# Altium PCB Thoi_gian_thuc.PcbDoc
Units mil, origin at the board's own origin, x right, y up, seen from the top; angles counter-clockwise.
Board outline 4486.03 x 3654.03 mil, 2 copper layers (Top Layer, Bottom Layer); 91 components, 78 nets, 312 pads, 86 vias.
Unrouted connection lines stored in the file: 3.
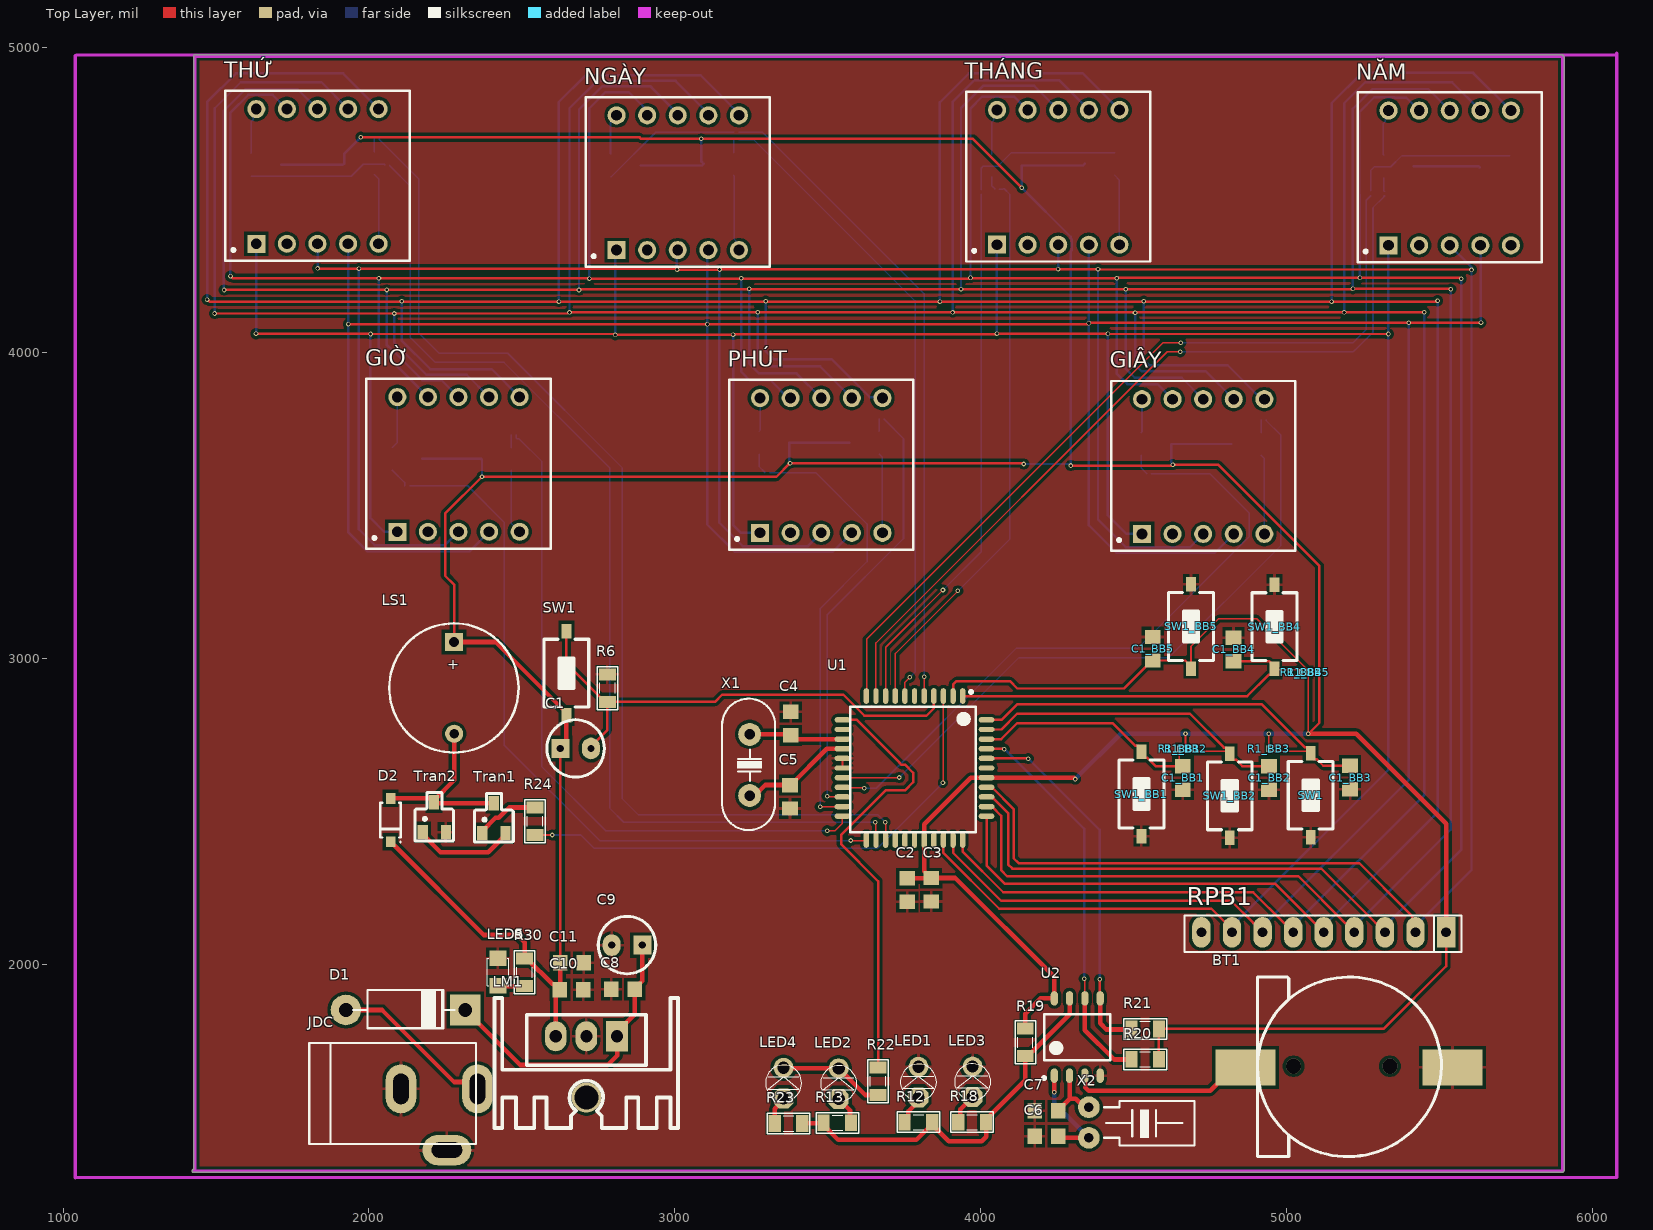
[diagram p0: Top Layer view]
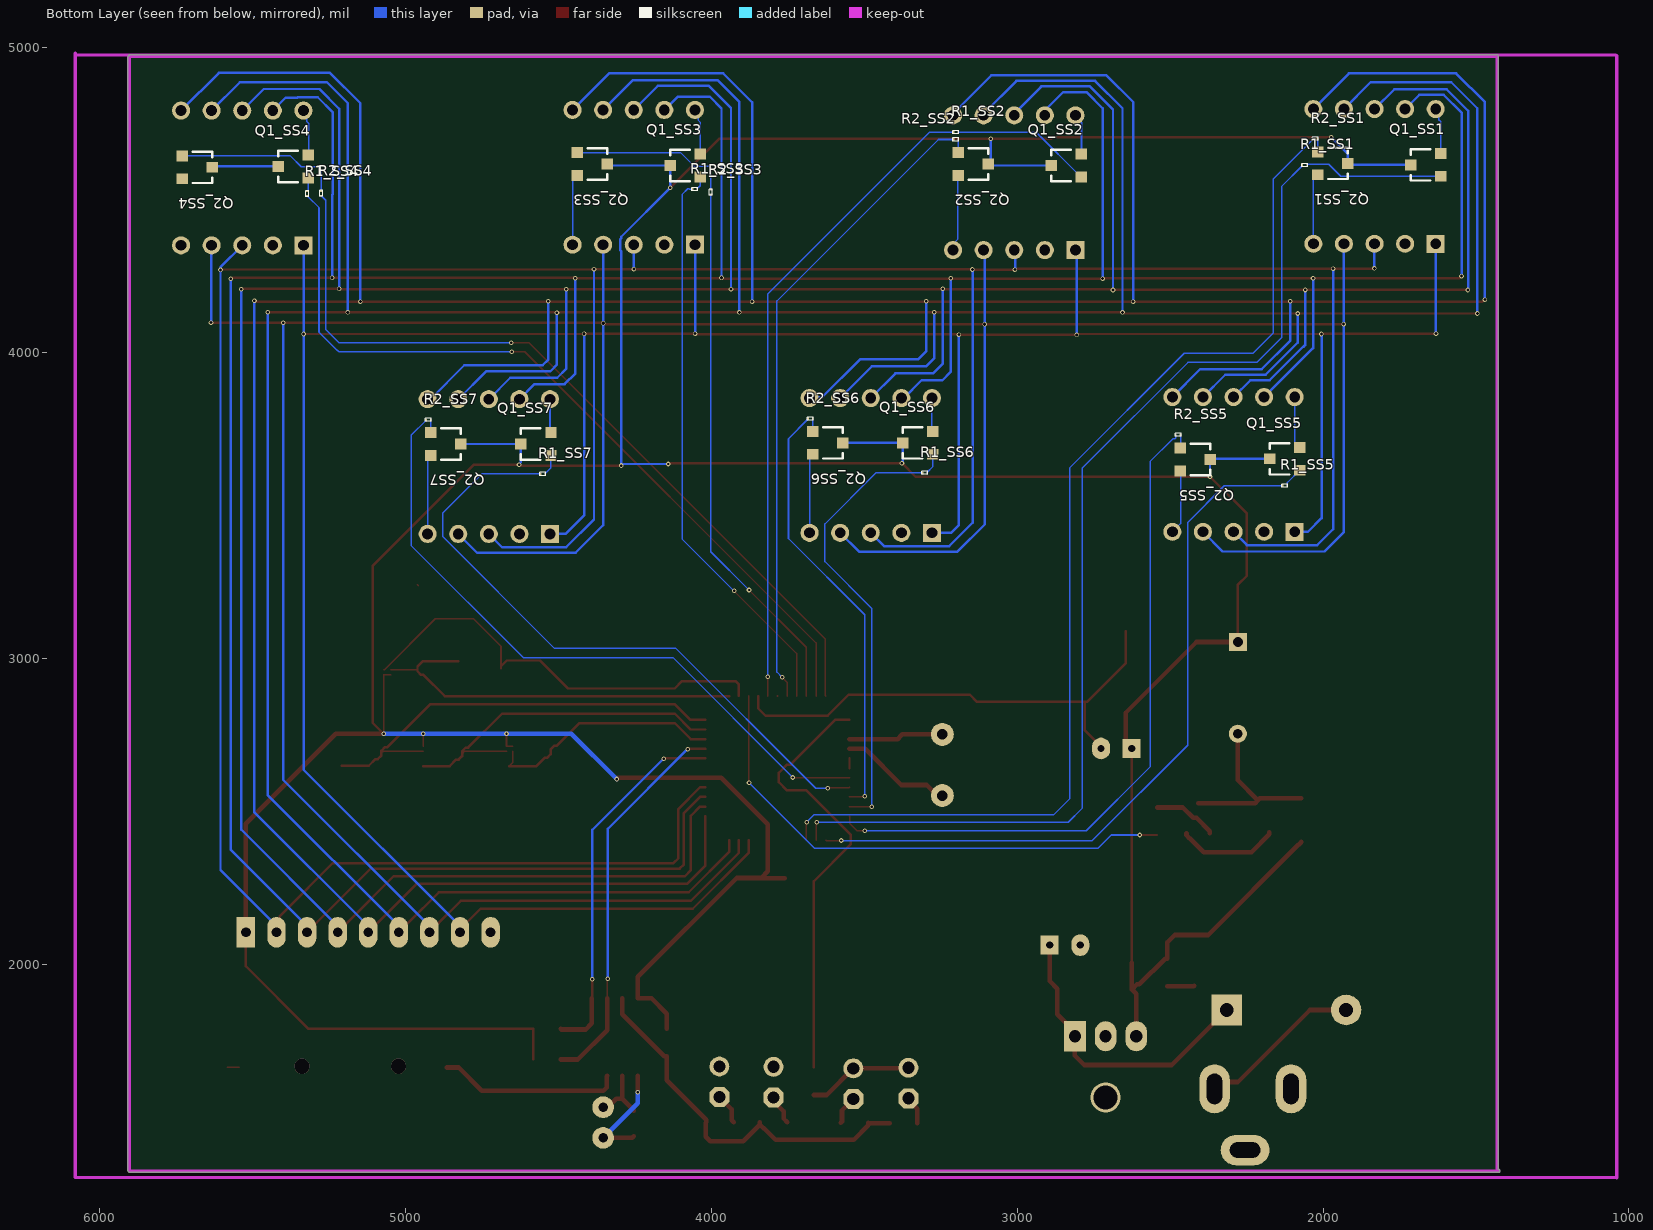
[diagram p1: Bottom Layer view, seen from below]

## Layer stack, top to bottom
Top Solder: solder mask 0.4, Solder Resist, Dk 3.5
Top Layer: signal copper 1.4
Dielectric 1: dielectric 12.6, FR-4, Dk 4.8
Bottom Layer: signal copper 1.4
Bottom Solder: solder mask 0.4, Solder Resist, Dk 3.5

## Board outline
1427,1320.98 cw(c1427,1326) 1426.98,1331.02 1426.98,4970 cw(c1432,4970) 1432,4975.02 5900,4975.02 cw(c5900,4970) 5904.71,4971.71 cw(c5903,4967) 5908.02,4967 5908.02,1328 cw(c5903,1328) 5905.4,1323.6 cw(c5901,1326) 5901,1320.98

## Design rules (kind name [scope] priority, off if disabled: settings)
Clearance [All] p1: gap=10 ignorepadtopadclearanceinfootprint=FALSE except(0: Arc-Hole Track-Hole SMDPad-Hole THPad-Hole Via-Hole Fill-Hole Poly-Hole Region-Hole Text-Hole)
PolygonConnect [All] p1: connectstyle=Relief reliefconductorwidth=10 reliefentries=4 polygonreliefangle="90 Angle" airgapwidth=10
RoomDefinition BB5 [InComponentClass('BB5')] p1: confinementstyle=ConfineIn formatcopy=TRUE lockcomponents=FALSE outline 0,0 2000,0 2000,1000 0,1000
RoomDefinition SS4 [InComponentClass('SS4')] p2: confinementstyle=ConfineIn formatcopy=TRUE lockcomponents=FALSE outline 0,0 2000,0 2000,1000 0,1000
RoomDefinition SS3 [InComponentClass('SS3')] p3: confinementstyle=ConfineIn formatcopy=TRUE lockcomponents=FALSE outline 0,0 2000,0 2000,1000 0,1000
RoomDefinition SS2 [InComponentClass('SS2')] p4: confinementstyle=ConfineIn formatcopy=TRUE lockcomponents=FALSE outline 0,0 2000,0 2000,1000 0,1000
RoomDefinition SS1 [InComponentClass('SS1')] p5: confinementstyle=ConfineIn formatcopy=TRUE lockcomponents=FALSE outline 0,0 2000,0 2000,1000 0,1000
RoomDefinition Thoi_gian_thuc [InComponentClass('Thoi_gian_thuc')] p6: confinementstyle=ConfineIn formatcopy=TRUE lockcomponents=FALSE outline 7012,1039 18258,1039 18258,2062 7012,2062
RoutingVias [All] p1: holewidth=8 width=15 viastyle="Through Hole" minholewidth=8 minwidth=15 maxholewidth=8 maxwidth=15
SolderMaskExpansion [All] p1: expansion=4 istentingtop=FALSE
Width [All] p1: maxlimit=15 minlimit=5 preferedwidth=8
30 further rules are at their usual default settings.

## Classes and differential pairs
channel class Led_7seg: SS1 SS2 SS3 SS4 SS5 SS6 SS7
channel class Button: BB1 BB2 BB3 BB4 BB5
component class Thoi_gian_thuc: BT1 C1 C2 C3 C4 C5 C6 C7 C8 C9 C10 C11 D1 D2 JDC LED1 LED2 LED3 LED4 LED5 LM1 LS1 R6 R12 R18 R19 R20 R21 R22 R23 R24 R30 RPB1 SW1 Tran1 Tran2 U1 U2 X1 X2
component class SS7: GIÂY Q1_SS7 Q2_SS7 R1_SS7 R2_SS7
component class SS6: PHÚT Q1_SS6 Q2_SS6 R1_SS6 R2_SS6
component class SS5: GIỜ Q1_SS5 Q2_SS5 R1_SS5 R2_SS5
component class SS4: Q1_SS4 Q2_SS4 R1_SS4 R2_SS4
component class SS3: Q1_SS3 Q2_SS3 R1_SS3 R2_SS3 THÁNG
component class SS2: Q1_SS2 Q2_SS2 R1_SS2 R2_SS2
component class SS1: Q1_SS1 Q2_SS1 R1_SS1
component class BB5: C1_BB5 R1_BB5 SW1_BB5
component class BB4: C1_BB4 R1_BB4 SW1_BB4
component class BB3: C1_BB3 R1_BB3
component class BB2: C1_BB2 R1_BB2 SW1_BB2
component class BB1: C1_BB1 R1_BB1 SW1_BB1

## Components (designator, comment, footprint, x,y, rotation, side; value= is the part's Value field where it differs from the comment)
BT1 "PIN 3V" "PIN CR1220-SMD" 4905.21,1959.28 r270 top
C1 "10uF" CA-ALU-2.54 2676,2707 r0 top value=104
C1_BB1 "0.47uF/1.6kV" "cap 0805" 4661,2611 r90 top (schematic designator C1)
C1_BB2 "0.47uF/1.6kV" "cap 0805" 4943,2611 r90 top (schematic designator C1)
C1_BB3 "0.47uF/1.6kV" "cap 0805" 5208,2612 r90 top (schematic designator C1)
C1_BB4 "0.47uF/1.6kV" "cap 0805" 4827,3031 r270 top (schematic designator C1)
C1_BB5 "0.47uF/1.6kV" "cap 0805" 4563,3033 r270 top (schematic designator C1)
C2 "0.47uF/1.6kV" "cap 0805" 3760,2244 r90 top
C3 "0.47uF/1.6kV" "cap 0805" 3839,2245 r90 top
C4 "0.47uF/1.6kV" "cap 0805" 3379,2788 r270 top
C5 "0.47uF/1.6kV" "cap 0805" 3377,2549 r90 top
C6 "0.47uF/1.6kV" "cap 0805" 4215,1439 r0 top
C7 "0.47uF/1.6kV" "cap 0805" 4215,1522 r0 top
C8 "0.47uF/1.6kV" "cap 0805" 2831,1920 r0 top
C9 "10uF" CA-ALU-2.54 2844,2064 r180 top value=104
C10 "0.47uF/1.6kV" "cap 0805" 2663,1918 r180 top
C11 "0.47uF/1.6kV" "cap 0805" 2664,2006 r180 top
D1 "Diode" DIO-2A 2340,1852 r180 top value=1N5007
D2 "1N4148" SOD123 2071,2473 r270 top
GIÂY "LED7SEG-2" LED7SEG-2-0.36#1 4727.79,3638.28 r0 top (schematic designator DS1)
GIỜ "LED7SEG-2" LED7SEG-2-0.36#1 2293,3645.37 r0 top (schematic designator DS1)
JDC "Jac DC" DC0 2230,1494 r0 top
LED1 "LED" LED-3MM-RED 3797,1566 r90 top value="LED 3 ly Single Colour"
LED2 "LED" LED-3MM-RED 3536,1561 r90 top value="LED 3 ly Single Colour"
LED3 "LED" LED-3MM-RED 3974,1567 r90 top value="LED 3 ly Single Colour"
LED4 "LED" LED-3MM-RED 3356,1563 r90 top value="LED 3 ly Single Colour"
LED5 "LED smd" LED-0805-Red 2422,1931 r90 top
LM1 "LM78xx" TO220-H3 2709,1670 r180 top
LS1 "Speaker" SPEAKER 2278.5,3055 r270 top
NGÀY "LED7SEG-2" LED7SEG-2-0.36#1 3010,4566.37 r0 top (schematic designator DS1)
NĂM "LED7SEG-2" LED7SEG-2-0.36#2 5534,4582 r0 top (schematic designator DS1)
PHÚT "LED7SEG-2" LED7SEG-2-0.36#1 3479,3642 r0 top (schematic designator DS1)
Q1_SS1 "2SC1815" SOT23-321 1665,4615 r90 bottom value=C1815 (schematic designator Q1)
Q1_SS2 "2SC1815" SOT23-321 2840,4613 r90 bottom value=C1815 (schematic designator Q1)
Q1_SS3 "2SC1815" SOT23-321 4086,4613 r90 bottom value=C1815 (schematic designator Q1)
Q1_SS4 "2SC1815" SOT23-321 5367,4610 r90 bottom value=C1815 (schematic designator Q1)
Q1_SS5 "2SC1815" SOT23-321 2125,3654 r90 bottom value=C1815 (schematic designator Q1)
Q1_SS6 "2SC1815" SOT23-321 3324.99,3706.12 r90 bottom value=C1815 (schematic designator Q1)
Q1_SS7 "2SC1815" SOT23-321 4573.79,3702.4 r90 bottom value=C1815 (schematic designator Q1)
Q2_SS1 "2SC1815" SOT23-321 1969,4620 r270 bottom value=C1815 (schematic designator Q2)
Q2_SS2 "2SC1815" SOT23-321 3144,4618 r270 bottom value=C1815 (schematic designator Q2)
Q2_SS3 "2SC1815" SOT23-321 4390,4618 r270 bottom value=C1815 (schematic designator Q2)
Q2_SS4 "2SC1815" SOT23-321 5681,4607 r270 bottom value=C1815 (schematic designator Q2)
Q2_SS5 "2SC1815" SOT23-321 2418,3652 r270 bottom value=C1815 (schematic designator Q2)
Q2_SS6 "2SC1815" SOT23-321 3619.99,3706.12 r270 bottom value=C1815 (schematic designator Q2)
Q2_SS7 "2SC1815" SOT23-321 4868.79,3702.4 r270 bottom value=C1815 (schematic designator Q2)
R1_BB1 "Res" RES-SMD-0101 4650,2706 r270 top (schematic designator R1)
R1_BB2 "Res" RES-SMD-0101 4670,2706 r270 top (schematic designator R1)
R1_BB3 "Res" RES-SMD-0101 4942,2706 r270 top (schematic designator R1)
R1_BB4 "Res" RES-SMD-0101 5048.01,2956.13 r90 top (schematic designator R1)
R1_BB5 "Res" RES-SMD-0101 5072.01,2956 r90 top (schematic designator R1)
R1_SS1 "Res" RES-SMD-0101 2060.12,4613.99 r180 bottom (schematic designator R1)
R1_SS2 "Res" RES-SMD-0101 3200.87,4721.99 r180 bottom (schematic designator R1)
R1_SS3 "Res" RES-SMD-0101 4054,4536 r180 bottom (schematic designator R1)
R1_SS4 "Res" RES-SMD-0101 5320.99,4521.13 r90 bottom (schematic designator R1)
R1_SS5 "Res" RES-SMD-0101 2125.12,3565.99 r180 bottom (schematic designator R1)
R1_SS6 "Res" RES-SMD-0101 3302.12,3608.12 r180 bottom (schematic designator R1)
R1_SS7 "Res" RES-SMD-0101 4550.91,3604.4 r180 bottom (schematic designator R1)
R2_SS1 "Res" RES-SMD-0101 2026,4700 r180 bottom (schematic designator R2)
R2_SS2 "Res" RES-SMD-0101 3201,4698 r180 bottom (schematic designator R2)
R2_SS3 "Res" RES-SMD-0101 4001.99,4526.13 r90 bottom (schematic designator R2)
R2_SS4 "Res" RES-SMD-0101 5275.99,4522.13 r90 bottom (schematic designator R2)
R2_SS5 "Res" RES-SMD-0101 2473.87,3732.49 r180 bottom (schematic designator R2)
R2_SS6 "Res" RES-SMD-0101 3676.87,3785.12 r180 bottom (schematic designator R2)
R2_SS7 "Res" RES-SMD-0101 4925.66,3781.4 r180 bottom (schematic designator R2)
R6 "Res" RES-SMD-0805 2780,2904 r270 top
R12 "Res" RES-SMD-0805 3797,1485 r180 top
R13 "Res" RES-SMD-0805 3532,1483 r0 top
R18 "Res" RES-SMD-0805 3972,1485 r180 top
R19 "Res" RES-SMD-0805 4146,1746 r90 top
R20 "Res" RES-SMD-0805 4538,1691 r0 top
R21 "Res" RES-SMD-0805 4538,1790 r0 top
R22 "Res" RES-SMD-0805 3665,1619 r270 top
R23 "Res" RES-SMD-0805 3372,1481 r180 top
R24 "Res" RES-SMD-0805 2543,2469 r270 top
R30 "Res" RES-SMD-0805 2509,1975 r90 top
RPB1 "10K" RN8 5522,2106 r180 top value="Tro thanh 10K"
SW1 "SW" SW-SMD_apes 2646,2953 r270 top value="SW chip 2 pin"
SW1 "SW" SW-SMD_apes 5079,2554 r90 top value="SW chip 2 pin"
SW1_BB1 "SW" SW-SMD_apes 4526,2558 r90 top value="SW chip 2 pin" (schematic designator SW1)
SW1_BB2 "SW" SW-SMD_apes 4815,2552.2 r90 top value="SW chip 2 pin" (schematic designator SW1)
SW1_BB4 "SW" SW-SMD_apes 4961,3105 r270 top value="SW chip 2 pin" (schematic designator SW1)
SW1_BB5 "SW" SW-SMD_apes 4688,3105.8 r270 top value="SW chip 2 pin" (schematic designator SW1)
THÁNG "LED7SEG-2" LED7SEG-2-0.36#1 4254,4584 r0 top (schematic designator DS1)
THỨ "LED7SEG-2" LED7SEG-2-0.36#1 1832,4587 r0 top (schematic designator DS1)
Tran1 "C1815" C1815 2411,2479 r0 top
Tran2 "C1815" C1815 2216,2482 r0 top
U1 "AT89S52-24AU" TQFP44 3784,2643 r270 top
U2 "DS1307" "DS1307 SMD" 4316,1765 r90 top
X1 "12Mhz" XT2 3245,2653 r90 top value=4Mhz
X2 "12Mhz" XT32k 4354,1534 r0 top value=4Mhz

## Footprints (in the part's own frame and the unit in brackets; to place one, negate y for a bottom-side part, rotate by r counter-clockwise, add the part's x,y. Pads: shape width x height; smd on the part's side, far side on the other; paste and mask are expansions set on the pad)
C1815 [mm] "C1815"
  rect 0.85x1.2 smd: 1(-1.016,-1.245) 2(0.909,-1.25) 3(-0.071,1.25)
  silkscreen extent -1.65,-1.98 1.55,2.06, body extent -1.55,-1.33 1.45,1.17, height 1.06
CA-ALU-2.54 [mm]
  rect 1.5x1.58 hole 0.6: 1(-1.27,0)
  oval 1.5x1.8 hole 0.6: 2(1.27,0)
  silkscreen extent -2.39,-2.39 2.39,2.39, body extent -2,-2.03 1.99,1.97, height 7.01
"cap 0805" [mm] "Molded Capacitor, 2-Leads, Body 2,0x1,3mm, IPC Medium Density"
  rect 1.2x1.3 smd: 1(-0.975,0) 2(0.975,0)
  body extent -1,-0.62 1,0.63, height 1.8
DC0 [mil] "Jac DC input"
  oval 100x160 hole 50 slot 100 at 90 deg: 1(125,100) 2(-125,100)
  oval 160x100 hole 50 slot 100 at 0 deg: 3(25,-100)
  silkscreen extent -425,-80 120,250, body extent -410,-105 134,269, height 434
DIO-2A [mil] "Diode 2A, W 150mil, L 450mil"
  round 100 hole 45: 1(415,0)
  rect 100x100 hole 45: 2(25,0)
  silkscreen extent 61,-65 391,60, body extent 4,-65 436,61, height 113
"DS1307 SMD" [mm] "DS1307 SMD"
  oval 1.2x0.6 smd: 1(-3.247,1.905) 2(-3.247,0.635) 3(-3.247,-0.635) 4(-3.247,-1.905) 5(3.172,-1.905) 6(3.172,-0.635) 7(3.172,0.635) 8(3.172,1.905)
  silkscreen extent -3.58,-2.75 1.85,2.88, body extent -3.15,-2.39 3.05,2.44, height 1.7
LED7SEG-2-0.36#1 [mm] "LED, 7-Segment Display, 9.2 mm, Dual Digit; 10 Leads; Row Space 10.7 mm; Pitch 2.54 mm"
  rect 1.5x1.5 hole 0.9: 1(-5.08,-5.842)
  round 1.5 hole 0.9: 2(-2.54,-5.842) 3(0,-5.842) 4(2.54,-5.842) 5(5.08,-5.842) 6(5.08,5.35) 7(2.54,5.35) 8(0,5.35) 9(-2.54,5.35) 10(-5.08,5.35)
  silkscreen extent -7.65,-7.24 7.65,6.86, body extent -7.5,-7.26 7.5,6.75, height 12.02
LED7SEG-2-0.36#2 [mm] "LED, 7-Segment Display, 9.2 mm, Dual Digit; 10 Leads; Row Space 10.7 mm; Pitch 2.54 mm"
  round 1.5 hole 0.9: 2(-2.54,-5.842) 3(0,-5.842) 4(2.54,-5.842) 5(5.08,-5.842) 6(5.08,5.35) 7(2.54,5.35) 8(0,5.35) 9(-2.54,5.35) 10(-5.08,5.35)
  rect 1.5x1.5 hole 0.9: S(-5.08,-5.842)
  silkscreen extent -7.65,-7.24 7.65,6.86, body extent -7.5,-7.26 7.5,6.75, height 12.02
LED-3MM-RED [mil]
  oct 65x65 hole 40: 1(0,0)
  round 65 hole 40: 2(100,0)
  silkscreen extent -9,-59 109,59, body extent -27,-77 117,80, height 181
LED-0805-Red [mil]
  rect 50x55 smd: 1(0,0) 2(90,0)
  silkscreen extent 0,-35 90,35, body extent 5,-25 85,25, height 43
"PIN CR1220-SMD" [mm]
  rect 3x5 smd: 1(7.5,-1) 2(7.5,16.2)
  silkscreen extent 0,0 14.9,15.3, body extent -0.18,-3.75 14.92,15.3, height 3
RES-SMD-0101 [mm]
  rect 0.15x0.25 smd: 1(-0.2,0) 2(0.2,0)
  silkscreen extent -0.25,-0.13 0.25,0.13, body extent -0.2,-0.1 0.2,0.1, height 0.12
RES-SMD-0805 [mil]
  rect 39.37x55 smd: 1(-45,0) 2(45,0)
  silkscreen extent -70,-34 70,33, body extent -39,-25 39,25, height 31
RN8 [mil] "R SIP8, 9 Pin"
  rect 60x100 hole 32: 1(0,0)
  oval 60x100 hole 32: 2(100,0) 3(200,0) 4(300,0) 5(400,0) 6(500,0) 7(600,0) 8(700,0) 9(800,0)
  silkscreen extent -50,-55 855,65, body extent -43,-44 843,5, height 259
SOD123 [mm] "SODFL, 2-Leads, Body 1.55x3.70mm, IPC Low Density"
  rect 0.9x0.8 smd: A(-1.8,0) K(1.8,0)
  silkscreen extent -1.45,-0.85 1.87,0.88, body extent -1.88,-0.77 1.82,0.83, height 1.27
SOT23-321 [mm]
  rect 0.9x0.95 smd mask+0: 1(0.95,-1.25)
  rect 0.9x0.95 smd: 2(0,1.25) 3(-0.95,-1.25)
  silkscreen extent -1.3,-0.38 1.3,1.25, body extent -1.52,-1.23 1.48,1.27, height 1.06
SPEAKER [mm]
  rect 1.5x1.5 hole 0.8: 1(0,0)
  round 1.5 hole 0.8: 2(7.62,0.013)
  silkscreen extent -1.55,-5.38 9.18,5.36, body extent -2.22,-6 13.24,6, height 4.5
SW-SMD_apes [mm] "Switch SMD type"
  rect 1.2x0.8 smd: 1(-3.5,0) 2(3.5,0)
  silkscreen extent -2.82,-1.85 2.82,1.85, body extent -3.05,-1.85 3.05,1.85, height 2.5
TO220-H3 [mm] "TO220-H3"
  round 2.5 hole 2: 0(-0.051,2.642)
  rect 1.8x2.5 hole 1: 1(-2.591,-2.438)
  oval 1.8x2.5 hole 1: 2(-0.051,-2.438) 3(2.489,-2.438)
  silkscreen extent -7.67,-5.61 7.57,5.18, body extent -7.42,-5.04 7.37,5.77, height 25
TQFP44 [mm] "TQFP, 44-Leads, Body 10X10mm, Pitch 0.80mm, IPC High Density"
  oval 1.3x0.45 smd: 1(-5.981,4) 2(-5.981,3.2) 3(-5.981,2.4) 4(-5.981,1.6) 5(-5.981,0.8) 6(-5.981,0) 7(-5.981,-0.8) 8(-5.981,-1.6) 9(-5.981,-2.4) 10(-5.981,-3.2) 11(-5.981,-4) 23(5.981,-4) 24(5.981,-3.2) 25(5.981,-2.4) 26(5.981,-1.6) 27(5.981,-0.8) 28(5.981,0) 29(5.981,0.8) 30(5.981,1.6) 31(5.981,2.4) 32(5.981,3.2) 33(5.981,4)
  oval 0.45x1.3 smd: 12(-4,-5.981) 13(-3.2,-5.981) 14(-2.4,-5.981) 15(-1.6,-5.981) 16(-0.8,-5.981) 17(0,-5.981) 18(0.8,-5.981) 19(1.6,-5.981) 20(2.4,-5.981) 21(3.2,-5.981) 22(4,-5.981) 34(4,5.981) 35(3.2,5.981) 36(2.4,5.981) 37(1.6,5.981) 38(0.8,5.981) 39(0,5.981) 40(-0.8,5.981) 41(-1.6,5.981) 42(-2.4,5.981) 43(-3.2,5.981) 44(-4,5.981)
  silkscreen extent -6.45,-5.33 5.33,5.07, body extent -5.99,-5.96 6.01,6.04, height 1.05
XT2 [mil] "Footpin for Crystal 2 pin"
  round 75 hole 34: 1(-100,0) 2(100,0)
  silkscreen extent -213,-83 217,90, body extent -216,-87 216,90, height 144
XT32k [mm]
  round 1.8 hole 0.813: 1(0,0) 2(0,-2.54)
  silkscreen extent 1.27,-3.17 8.76,0.51, body extent -0.15,-2.42 8.2,-0.12, height 1.95

## Part data
BT1: "Battery 3VDC"
C1 C9: library part CN-ALU-DIP, "Capacitor (Semiconductor SIM Model)", LatestRevisionDate=17-Jul-2002, LatestRevisionNote="Re-released for DXP Platform.", PackageReference=C1206, Publisher="Altium Limited"
C1_BB1 C1_BB2 C1_BB3 C1_BB4 C1_BB5 C2 C3 C4 C5 C6 C7 C8 C10 C11: library part Cap
D1: "Default Diode", Code - JEDEC=DO-214-AB, Published=8-Jun-2000, Publisher="Altium Limited", Revision="July-2002: Re-released for DXP Platform."
D2: library part "Diode 1N4148"
GIÂY GIỜ NGÀY NĂM PHÚT THÁNG THỨ: "9.2 mm Green 7-Segment Display: 2-Digit, RH DP", ComponentLink1Description="Manufacturer Link", ComponentLink1URL=http://www.avagotech.com/, DatasheetVersion=14-Mar-2003, LatestRevisionDate=11-Oct-2004, LatestRevisionNote="Display outline superimposed on PCB Footprint.", PackageDescription="LED, 7-Segment Display, 9.2 mm, Dual Digit; 10 Leads; Row Space 10.7 mm; Pitch 2.54 mm", PackageReference=HDSM-577, PackageVersion=14-Mar-2003, Published=26-May-2004, Publisher="Altium Limited"
JDC: library part DCIN, "Jac DC input"
LED1 LED2 LED3 LED4: "LED Single colour Green and Red"
LS1: "Loudspeaker", LatestRevisionDate=17-Jul-2002, LatestRevisionNote="Re-released for DXP Platform.", PackageReference=PIN2, Published=24-Mar-1999, Publisher="Altium Limited"
Q1_SS1 Q1_SS2 Q1_SS3 Q1_SS4 Q1_SS5 Q1_SS6 Q1_SS7 Q2_SS1 Q2_SS2 Q2_SS3 Q2_SS4 Q2_SS5 Q2_SS6 Q2_SS7: "NPN 600mW, ECB"
R1_BB1 R1_BB2 R1_BB3 R1_BB4 R1_BB5 R1_SS1 R1_SS2 R1_SS3 R1_SS4 R1_SS5 R1_SS6 R1_SS7 R2_SS1 R2_SS2 R2_SS3 R2_SS4 R2_SS5 R2_SS6 R2_SS7 R6 R12 R13 R18 R19 R20 R21 R22 R23 R24 R30: library part Res-SMD, "Resistor", Manufacturer="Generic Components", Class=Passive, Published=08/06/2000, Publisher="Altium Hobart Technology Centre"
RPB1: library part RN8, "Resistor 8 (Thanh)"
SW1 SW1 SW1_BB1 SW1_BB2 SW1_BB4 SW1_BB5: library part SW2, "Switch button 2 pin"
U1: "Atmel 8 Bit Micro 4.0-5.5V 24MHz -40 to +80 Deg C 44TQFP (44A) Package GREEN OPTION", Package="44A 44-lead, Thin Plastic Gull Wing Quad Flatpack (TQFP)", GREEN OPTION=YES, PartNr=AT89S52-24AU, Vendor=ATMEL
U2: library part ds1307
X1 X2: library part XT2_1, "Crystal, 32.768 KHz, -40 to 85 degC, 3.2 x 1.5 x 0.9 mm SMD"

## Via types
v1: diameter 15, hole 8, Top Layer to Bottom Layer, 50 vias
v2: diameter 15, hole 10, Top Layer to Bottom Layer, 34 vias
v3: diameter 50, hole 50, Top Layer to Bottom Layer, 2 vias

## Nets (pads, with @x,y where several pads share a name; then routed paths per layer and width w, separated by ;. In a path a pad name is that pad's centre, name@x,y a point inside that pad or via, vN(x,y) a via of type N, cw(c..) or ccw(c..) an arc to the next point about the centre after c; other vN are vias at no path point)
A1: GIÂY.3 GIỜ.3 NGÀY.3 NĂM.3 PHÚT.3 RPB1.2 THÁNG.3 THỨ.3 U1.37 | length 11807
  Top Layer w8: v2(1832.5,4276.5) 1832.96,4276.04 1966.94,4276.04 v2(1967.39,4275.59) v2@3003.02,4275.59 ; v2(3008,4272.5) 3008.25,4272.75 3146.75,4272.75 v2(3147,4273) 3147.62,4273.62 4253.13,4273.62 v2(4253.76,4274.25) 4253.88,4274.12 4383.88,4274.12 4385,4273 5604,4273 v2(5605,4272) ; U1.37 4037.04,2580.01 4108,2509.04 4108,2348 4124,2332 5238,2332 5394,2176 5410.97,2159.03 5410.97,2156.69 5412.05,2155.6 5412.05,2115.95 RPB1.2
  Bottom Layer w5: NGÀY.3@3011,4336.37 NGÀY.3@3011,4345.37 ; THÁNG.3@4231.51,4351.38 THÁNG.3@4231.76,4351.13 ; v2(4253.76,4274.25) THÁNG.3@4253.76,4354.13
  Bottom Layer w8: THỨ.3 1832.25,4356.75 1832.25,4276.75 v2(1832.5,4276.5) ; v2(1967.39,4275.59) 1967.39,3423.61 2019.16,3371.84 2249.47,3371.84 GIỜ.3 ; NGÀY.3@3007,4345 3007,4273.5 v2(3008,4272.5) ; v2(3147,4273) 3146,4272 3146,3445 3222.53,3368.47 3435.47,3368.47 PHÚT.3 ; v2(4253.76,4274.25) 4253.88,4274.37 4253.88,4353.88 THÁNG.3 ; v2(4384,4274) 4384,3456 4475.25,3364.75 4684.27,3364.75 GIÂY.3 ; RPB1.2 5422,2126 5605,2309 v2(5605,4272) 5603.66,4273.34 5603.66,4282.21 NĂM.3@5534.01,4351.86
Alarm: C1_BB5.2 R1_BB5.2 SW1_BB5.2 U1.2 | length 1439.3
  Top Layer w5: SW1_BB5.2 4688,2975.87 4688,3041 4778,3131 4902.91,3131 5070.04,2963.88 R1_BB5.2
  Top Layer w8: U1.2 3909.98,2915.98 3921,2927 4096,2927 4120,2903 4469.42,2903 4561.03,2994.61 C1_BB5.2 4669.26,2994.61 SW1_BB5.2@4688,2975.87
B1: GIÂY.9 GIỜ.9 NGÀY.9 NĂM.9 PHÚT.9 RPB1.3 THÁNG.9 THỨ.9 U1.36 | length 12449.8
  Top Layer w8: v2(1547.5,4251) 1548.69,4251 1555.69,4244 v1(2033,4244) 2720,4244 v2(2721,4243) v2@3962.11,4243 ; v2(3967,4246) 3968,4245 v1(4445,4245) 4445.5,4245.5 5239.5,4245.5 v2(5240,4246) 5566.24,4246 5569.24,4243 v1(5571.13,4243) ; U1.36 4037.04,2548.51 4090,2495.55 4090,2328 4104,2314 5114,2314 5292.05,2135.95 5297.98,2135.95 5322,2111.93 RPB1.3
  Bottom Layer w8: v2(1547.5,4251) 1547.5,4785.79 1605.71,4844 1685.63,4844 THỨ.9 ; v1(2033,4244) 2033,4016 GIỜ.9 ; v2(2721,4243) 2721,4800 2774,4853 2849.63,4853 2907,4795.63 NGÀY.9@2907,4785.63 ; v1(3218,4244) 3218,3938 3245,3911 3312.54,3911 3370.91,3852.63 PHÚT.9 ; v2(3967,4246) 3967,4799.87 4005.29,4838.16 4073.16,4838.16 4073.79,4837.53 4110.98,4837.53 4153.88,4794.63 THÁNG.9 ; v1(4445,4245) 4445,3933 4480,3898 4578.7,3898 GIÂY.9 ; v2(5240,4246) 5240,4516.88 5238.5,4518.38 5238.5,4787.37 5287.16,4836.03 5353.23,4836.03 5354.73,4834.53 5391.98,4834.53 NĂM.9@5434.01,4792.51 ; RPB1.3 5322,2126 5571.13,2375.13 v1(5571.13,4243)
C1: GIÂY.8 GIỜ.8 NGÀY.8 NĂM.8 PHÚT.8 RPB1.4 THÁNG.8 THỨ.8 U1.35 | length 13262.8
  Top Layer w8: v2(1527,4206) v1(2059,4206) v2(2687,4206) 2688.89,4206 2691.89,4209 v2(3936,4209) v1(4475,4209) v2@5212.11,4209 ; U1.35 4037.04,2517.02 4067,2487.05 4067,2309 4087,2289 5039,2289 5192.05,2135.95 5197.98,2135.95 5222,2111.93 RPB1.4 ; v2(5217,4210) 5217.5,4209.5 5536.5,4209.5 v1(5537,4209)
  Bottom Layer w5: 2922.5,4871.5 NGÀY.8@2998.37,4795.63 ; NGÀY.8@3001.37,4787 NGÀY.8@3010,4787 ; 4174.51,4874 4175.51,4873
  Bottom Layer w8: v2(1527,4206) 1526,4207 1526,4792 1596,4862 1767.63,4862 THỨ.8 ; v1(2059,4206) 2059,4025.69 2063.69,4021 2065,4021 2175,3911 2238,3911 GIỜ.8 ; v2(2687,4206) 2687,4796 2762.5,4871.5 2922.5,4871.5 ; 2922.5,4870 2922.63,4870 NGÀY.8@2997.69,4794.94 ; NGÀY.8@3000.69,4786.31 NGÀY.8 ; v1(3244,4210) 3244,3964 3275,3933 3398.63,3933 PHÚT.8 ; v2(3936,4209) 3936,4801 4009,4874 4174.51,4874 ; 4174.51,4873 4175.51,4873 4253.88,4794.63 THÁNG.8 ; v1(4475,4209) 4475,3948 4504,3919 4657.7,3919 GIÂY.8 ; v2(5217,4210) 5217,4798 5282,4863 5463.51,4863 NĂM.8@5534.01,4792.51 ; RPB1.4 5222,2126 5537,2441 v1(5537,4209)
D1: GIÂY.6 GIỜ.6 NGÀY.6 NĂM.6 PHÚT.6 RPB1.5 THÁNG.6 THỨ.6 U1.34 | length 14717.1
  Top Layer w8: v2(1471,4174.62) 1472.89,4174.62 1479.51,4168 v2(2621,4168) 2621.06,4167.94 3866.94,4167.94 v2(3867.01,4167.88) 3867.07,4167.94 5147.94,4167.94 v2(5148,4168) 5489.11,4168 5492.11,4171 v1(5494,4171) ; U1.34@4020.99,2484 U1.34 4019.47,2324.53 4080,2264 4964,2264 5092.05,2135.95 5097.98,2135.95 5122,2111.93 RPB1.5
  Bottom Layer w5: GIÂY.6@4926.9,3849.8 GIÂY.6
  Bottom Layer w8: v2(1471,4174.62) 1471,4820 1565,4914 1915.63,4914 THỨ.6 ; v1(2107,4169) 2107,4041 2201,3947 2402,3947 GIỜ.6 ; v2(2621,4168) 2621,4820 2708.5,4907.5 3085.13,4907.5 NGÀY.6@3207,4785.63 ; v1(3297,4169) 3297,4007 3325,3979 3514.19,3979 3637.47,3855.71 3675.92,3855.71 PHÚT.6 ; v2(3867.01,4167.88) 3867.01,4819.88 3961.13,4914 4334.51,4914 4453.88,4794.63 THÁNG.6 ; v1(4533,4169) 4533,3979 4552,3960 4808,3960 4919.09,3848.91 GIÂY.6 ; RPB1.5 5122,2126 5494,2498 v1(5494,4171) ; v2(5148,4168) 5148,4816.87 5247.13,4916 5610.51,4916 NĂM.6@5734.01,4792.51
Down: C1_BB3.2 R1_BB3.2 SW1.2@5079,2691.8 U1.44 | length 1441.4
  Top Layer w5: R1_BB3.2 5072.67,2698.13 SW1.2@5079,2691.8
  Top Layer w8: U1.44 4068.48,2800.48 4119,2851 4919.8,2851 5059.38,2711.42 5067.25,2711.42 5079,2699.67 5079,2691.8 5079,2683.92 5090.75,2672.17 5098.62,2672.17 5120.41,2650.39 C1_BB3.2
E1: GIÂY.7 GIỜ.7 NGÀY.7 NĂM.7 PHÚT.7 RPB1.6 THÁNG.7 THỨ.7 U1.33 | length 13700.1
  Top Layer w8: v2(1496,4129) v1(2083,4129) 2650.11,4129 2654.11,4133 v2(2656,4133) 2656.25,4132.75 3908.25,4132.75 v2(3908.5,4132.5) 5188.5,4132.5 v2(5189,4133) v1(5451,4133) ; U1.33 3941.48,2369.52 4074,2237 4891,2237 4992.05,2135.95 4997.98,2135.95 5022,2111.93 RPB1.6
  Bottom Layer w5: GIỜ.7 GIỜ.7@2394,3857
  Bottom Layer w8: v2(1496,4129) 1496,4800 1581,4885 1844.63,4885 THỨ.7 ; v1(2083,4129) 2083,4034 2188,3929 2320,3929 GIỜ.7 ; v2(2656,4133) 2656,4800 2745.5,4889.5 3003.13,4889.5 NGÀY.7@3107,4785.63 ; v1(3271,4133) 3271,3983 3298,3956 3475.63,3956 PHÚT.7 ; v2(3908.5,4132.5) 3908.5,4820.5 3980,4892 4256.63,4892 THÁNG.7 ; v1(4505,4132) 4505,3962 4527,3940 4736.7,3940 GIÂY.7 ; RPB1.6 5022,2126 5451,2555 v1(5451,4133) ; v2(5189,4133) 5189,4817 5257,4885 5541.51,4885 NĂM.7@5634.01,4792.51
F1: GIÂY.4 GIỜ.4 NGÀY.4 NĂM.4 PHÚT.4 RPB1.7 THÁNG.4 THỨ.4 U1.32 | length 11666
  Top Layer w8: v2(1933,4094.05) v2(3107,4094) 4348.61,4094 4351.86,4097.25 v2(4353.75,4097.25) 4354.63,4098.12 5635.12,4098.12 v2(5636,4099) ; U1.32 3910,2366 4067,2209 4819,2209 4892.05,2135.95 4897.98,2135.95 4922,2111.93 RPB1.7
  Bottom Layer w5: THÁNG.4@4331.51,4351.38 THÁNG.4@4331.75,4351.13
  Bottom Layer w8: THỨ.4 1933,4356 v2(1933,4094.05) 1933,3413 1995,3351 2328.63,3351 GIỜ.4 ; NGÀY.4@3107,4345 v2(3107,4094) 3106,4093 3106,3440 3195.53,3350.47 3517.47,3350.47 PHÚT.4 ; v2(4353.75,4097.25) 4354,4097.49 THÁNG.4 ; v2@4353.79,4096.79 4353.79,3437.21 4444.25,3346.75 4766.27,3346.75 GIÂY.4 ; RPB1.7 4922,2126 5400,2604 v1(5400,4099) ; NĂM.4@5634.01,4351.88 5635,4350.88 5635,4100 v2(5636,4099)
G1: GIÂY.1 GIỜ.1 NGÀY.1 NĂM.S PHÚT.1 RPB1.8 THÁNG.1 THỨ.1 U1.31 | length 10289.1
  Top Layer w8: v2(1631,4063) 2005,4063 v2(2006,4062) 2801.11,4062 2803.61,4059.5 v2(2805.5,4059.5) 2805.75,4059.75 3190.75,4059.75 3192,4061 v2@4047.96,4061 ; U1.31 3878.49,2365.51 4061,2183 4755,2183 4822,2116 RPB1.8 ; v2(4053,4063) 4053.09,4062.91 4415.91,4062.91 4416.82,4062 v2(5333,4062)
  Bottom Layer w8: v2(1631,4063) 1632,4064 THỨ.1 ; v2(2006,4062) 2005,4061 2005,3460 2049.63,3415.37 GIỜ.1 ; v2(2805.5,4059.5) 2805.5,4343.5 NGÀY.1@2807,4345 ; v2(3191,4060) 3191,3438 3217,3412 PHÚT.1 ; v2(4053,4063) 4053,4353 THÁNG.1 ; v2(4416,4062.82) 4416,3469 4476.72,3408.28 GIÂY.1 ; RPB1.8 4822,2126 5333.51,2637.51 5333.51,4061.49 v2(5333,4062) 5333,4350.87 NĂM.S@5334.01,4351.88
GND: BT1.2 C1_BB1.1 C1_BB2.1 C1_BB3.1 C1_BB4.1 C1_BB5.1 C2.1 C3.1 C4.1 C5.1 C6.1 C7.1 C8.1 C9.2 C10.1 C11.1 JDC.2 JDC.3 LED1.2 LED3.2 LED5.2 LM1.2 R6.1 SW1.1@5079,2416.2 SW1_BB1.1 SW1_BB2.1 SW1_BB4.1 SW1_BB5.1 Tran2.2 U1.16 U1.17 U2.4 | length 75.1
  Top Layer w5: SW1_BB4.1@4958,3239.8 SW1_BB4.1 ; BT1.2 BT1.2@5582.37,1664
  Top Layer w8: U1.17 U1.16
led: R12.1 R13.1 R18.1 R19.1 R23.1 U2.7 | length 1255.8
  Top Layer w15: R23.1 R13.1@3485,1481 ; R13.1 3487,1475.19 3535.19,1427 3790,1427 3828,1465 3829.81,1465 R12.1@3842,1477.19 ; R12.1 R12.1@3842,1477.19 ; U2.7 4291,1838.18 4153.81,1701 R19.1 4146,1621.81 4017,1492.81 R18.1 4019,1483 4019,1438 4004,1423 3896.19,1423 R12.1@3842,1477.19
Mode: C1_BB1.2 R1_BB1.2 SW1_BB1.2 U1.42 | length 784
  Top Layer w5: R1_BB1.2 4650.01,2660.38 C1_BB1.2
  Top Layer w8: U1.42 4067.49,2737.49 4120,2790 4431.8,2790 4506.38,2715.42 4514.25,2715.42 4526,2703.67 SW1_BB1.2 4526,2687.92 4537.75,2676.17 4545.62,2676.17 4572.41,2649.39 C1_BB1.2
NetBT1_1: BT1.1 U2.3 | length 598.4
  Top Layer w15: U2.3 4342.65,1635.51 4342.65,1598.35 4353,1588 4750.46,1588 4826.46,1664 BT1.1
NetC4_2: C4.2 U1.14 X1.2 | length 310
  Top Layer w15: X1.2 3375.61,2753 C4.2 3391.13,2737.49 U1.14
NetC5_2: C5.2 U1.15 X1.1 | length 366.9
  Top Layer w15: X1.1 3261.08,2553 3295.47,2587.39 C5.2 3378.97,2587.39 3497.57,2705.99 U1.15
NetC6_2: C6.2 U2.1 X2.2 | length 352.8
  Top Layer w15: v1(4240.77,1582.64) 4241,1582.86 U2.1 ; C6.2 4258.39,1434 X2.2
  Bottom Layer w15: v1(4240.77,1582.64) 4240.77,1547.23 X2.2
NetC7_2: C7.2 U2.2 X2.1 | length 205.2
  Top Layer w15: C7.2 4253.39,1523.97 4291,1561.58 ; U2.2 4291,1561.58 ; X2.1 4338.88,1534 4311.3,1561.58 4291,1561.58
NetC8_2: C8.2 C9.1 D1.2 LM1.1 | length 980.2
  Top Layer w15: D1.2 2495,1672 2781,1672 2812,1703 2812,1765 LM1.1 2811,1779.78 2869.39,1838.17 C8.2 2869.39,1921.97 2894,1946.58 C9.1
NetD1_1: D1.1 JDC.1 | length 536.9
  Top Layer w15: D1.1 2043,1852 2278.5,1616.5 2332.5,1616.5 JDC.1
NetD2_A: D2.A LS1.2 Tran1.3 Tran2.3 | length 588.2
  Top Layer w15: D2.A 2207.44,2543.87 Tran2.3@2213.2,2538.1 ; LS1.2 2279,2603.9 Tran2.3@2213.2,2538.1 ; Tran1.3 2222.43,2528.21 2213.2,2537.45 Tran2.3@2213.2,2538.1
NetDS1_SS1_5: Q2_SS1.1 THỨ.5 | length 231.3
  Bottom Layer w5: Q2_SS1.1 2032,4568.81 THỨ.5
NetDS1_SS1_10: Q1_SS1.1 THỨ.10 | length 152.6
  Bottom Layer w5: Q1_SS1.1 1615,4653.19 1615,4756 1621.66,4762.66 1621.66,4787.29 THỨ.10
NetDS1_SS2_5: NGÀY.5 Q2_SS2.1 | length 231.3
  Bottom Layer w5: Q2_SS2.1 3194,4579.81 3194,4372.63 3207,4359.63 NGÀY.5@3207,4355
NetDS1_SS2_10: NGÀY.10 Q1_SS2.1 | length 152.6
  Bottom Layer w5: Q1_SS2.1 2790,4651.19 2790,4754 2796.66,4760.66 2796.66,4785.29 NGÀY.10@2807,4795.63
NetDS1_SS3_5: Q2_SS3.1 THÁNG.5 | length 231.3
  Bottom Layer w5: Q2_SS3.1@4439.22,4580.47 4453.01,4566.69 THÁNG.5@4453.01,4354.88
NetDS1_SS3_10: Q1_SS3.1 THÁNG.10 | length 152.6
  Bottom Layer w5: Q1_SS3.1@4036.79,4650.28 4036.01,4651.06 4036.01,4753.88 4042.66,4760.53 4042.66,4785.16 THÁNG.10@4053.01,4795.51
NetDS1_SS4_5: NĂM.5 Q2_SS4.1
NetDS1_SS4_10: NĂM.10 Q1_SS4.1 | length 152.6
  Bottom Layer w5: Q1_SS4.1@5317.79,4647.28 5317.01,4648.06 5317.01,4750.88 5323.66,4757.53 5323.66,4782.16 NĂM.10@5334.01,4792.51
NetDS1_SS5_5: GIỜ.5 Q2_SS5.1 | length 211.8
  Bottom Layer w5: Q2_SS5.1@2466.21,3616.09 2466.21,3442.16 GIỜ.5
NetDS1_SS5_10: GIỜ.10 Q1_SS5.1 | length 172.3
  Bottom Layer w5: Q1_SS5.1 2076.77,3691.4 2093,3707.63 GIỜ.10
NetDS1_SS6_5: PHÚT.5 Q2_SS6.1 | length 260.8
  Bottom Layer w5: Q2_SS6.1 3679,3658.93 PHÚT.5
NetDS1_SS6_10: PHÚT.10 Q1_SS6.1 | length 110.4
  Bottom Layer w5: Q1_SS6.1 3279,3746.75 PHÚT.10
NetDS1_SS7_5: GIÂY.5 Q2_SS7.1 | length 260.8
  Bottom Layer w5: Q2_SS7.1 4927.79,3655.21 GIÂY.5
NetDS1_SS7_10: GIÂY.10 Q1_SS7.1 | length 110.4
  Bottom Layer w5: Q1_SS7.1 4527.79,3743.02 GIÂY.10
NetLED1_1: LED1.1 R12.2 | length 99.6
  Top Layer w15: R12.2 3764.19,1497.19 3764.19,1521.33 3797,1554.14 LED1.1
NetLED2_1: LED2.1 R13.2 | length 95
  Top Layer w15: LED2.1 3573.19,1523.81 3573.19,1486.81 R13.2
NetLED3_1: LED3.1 R18.2 | length 101.5
  Top Layer w15: R18.2 3933.72,1491.71 3933.72,1526.72 LED3.1
NetLED4_1: LED4.1 R23.2 | length 94
  Top Layer w15: R23.2 3327,1529.21 3356,1558.21 LED4.1
NetLED5_1: LED5.1 R30.1 | length 87.4
  Top Layer w15: LED5.1 2423,1930 R30.1
NetQ1_SS1_3: Q1_SS1.3 R1_SS1.2 | length 455.2
  Bottom Layer w5: Q1_SS1.3 1942.6,4577.6 1982,4617 2049.25,4617 2049.83,4616.42 2051.8,4616.42 2052.25,4615.97 R1_SS1.2
NetQ1_SS2_3: Q1_SS2.3 R1_SS2.2 | length 464.8
  Bottom Layer w5: Q1_SS2.3 2791.77,4575.6 2938.17,4722 R1_SS2.2@3192.87,4722 ; R1_SS2.2@3192.87,4723.96 R1_SS2.2@3192.87,4722 ; R1_SS2.2 R1_SS2.2@3192.87,4722
NetQ1_SS3_3: Q1_SS3.3 R1_SS3.2 | length 43.4
  Bottom Layer w5: Q1_SS3.3@4036.79,4575.47 4036.79,4547.06 4046.01,4537.84 R1_SS3.2@4046.01,4535.88
NetQ1_SS4_3: Q1_SS4.3 R1_SS4.2 | length 46.1
  Bottom Layer w5: Q1_SS4.3 5317.79,4530.24 5319.03,4529 R1_SS4.2
NetQ1_SS5_3: Q1_SS5.3 R1_SS5.2 | length 70.3
  Bottom Layer w5: Q1_SS5.3 2076.77,3616.6 2116.8,3576.57 2116.8,3566.45 R1_SS5.2 R1_SS5.2@2117.25,3567.97
NetQ1_SS6_3: Q1_SS6.3 R1_SS6.2 | length 68.2
  Bottom Layer w5: Q1_SS6.3 3275.78,3628.56 3294.25,3610.09 R1_SS6.2
NetQ1_SS7_3: Q1_SS7.3 R1_SS7.2 | length 68.2
  Bottom Layer w5: Q1_SS7.3 4524.57,3624.83 4543.04,3606.37 R1_SS7.2
NetQ2_SS1_3: Q2_SS1.3 R2_SS1.2 | length 42.6
  Bottom Layer w5: Q2_SS1.3 2018.25,4657.44 R2_SS1.2@2018.25,4700
NetQ2_SS2_3: Q2_SS2.3 R2_SS2.2 | length 42.6
  Bottom Layer w5: Q2_SS2.3 3193.25,4655.44 R2_SS2.2@3193.25,4698
NetQ2_SS3_3: Q2_SS3.3 R2_SS3.2 | length 528.6
  Bottom Layer w5: R2_SS3.2 4002,4604 4009,4611 4057,4611 4101.4,4655.4 Q2_SS3.3 ; Q2_SS3.3@4439.22,4655.28 Q2_SS3.3@4439.26,4655.32
NetQ2_SS4_3: Q2_SS4.3 R2_SS4.2 | length 540.8
  Bottom Layer w5: R2_SS4.2 5276,4597 5288,4609 5341,4609 5376.4,4644.4 Q2_SS4.3
NetQ2_SS5_3: Q2_SS5.3 R2_SS5.2 | length 41.7
  Bottom Layer w5: R2_SS5.2 2465.99,3691.11 Q2_SS5.3@2466.21,3690.9
NetQ2_SS6_3: Q2_SS6.3 R2_SS6.2 | length 41.7
  Bottom Layer w5: R2_SS6.2 3668.99,3743.74 Q2_SS6.3
NetQ2_SS7_3: Q2_SS7.3 R2_SS7.2 | length 41.7
  Bottom Layer w5: R2_SS7.2 4917.79,3740.02 Q2_SS7.3
NetR24_1: R24.1 Tran1.1 | length 210.8
  Top Layer w15: Tran1.1 2371,2436.89 2414.17,2480.06 2425.15,2480.06 2459.09,2514 R24.1
NetTran1_2: Tran1.2 Tran2.1 | length 331.4
  Top Layer w15: Tran2.1 2176,2426.11 2234.11,2368 2390,2368 2435.66,2413.66 2437.57,2413.66 2446.8,2422.9 Tran1.2
Ok: C1_BB4.2 R1_BB4.2 SW1_BB4.2 U1.1 | length 1298.7
  Top Layer w5: SW1_BB4.2 4964.2,2964 R1_BB4.2
  Top Layer w8: U1.1 3941.95,2878 4871.8,2878 4941.38,2947.58 4949.25,2947.58 4961,2959.33 SW1_BB4.2 4961,2975.08 4943.46,2992.61 C1_BB4.2
P2_0: R2_SS7.1 U1.18 | length 2178.5
  Top Layer w5: U1.18 3733.5,2611.5 v1(3734,2612)
  Bottom Layer w5: v1(3734,2612) 4126,3004 4615,3004 4982,3371 4982,3730.97 4933.54,3779.43 R2_SS7.1
P2_1: R1_SS7.1 U1.19 | length 2122.2
  Top Layer w5: U1.19 3550.03,2578.5 3618.5,2578.5 v1(3620,2577)
  Bottom Layer w5: v1(3620,2577) 3659,2577 4116,3034 4512.95,3034 4878.8,3399.84 4878.8,3476.78 4751.18,3604.4 R1_SS7.1
P2_2: R2_SS6.1 U1.20 | length 1414
  Top Layer w5: v1(3499,2551) 3500.24,2549.76 3547.28,2549.76 U1.20
  Bottom Layer w5: v1(3499,2551) 3499,3144 3748,3393 3748,3719.9 3684.74,3783.16 R2_SS6.1
P2_3: R1_SS6.1 U1.21 | length 1449.6
  Top Layer w5: v1(3476,2516) 3476.51,2516.51 3548.02,2516.51 U1.21
  Bottom Layer w5: R1_SS6.1 3461.88,3608.12 3629,3441 3629,3318 3476,3165 v1(3476,2516)
P2_4: R2_SS5.1 U1.22 | length 2226.6
  Top Layer w5: v1(3499,2438) 3524,2438 3547,2461 3547,2483.99 U1.22
  Bottom Layer w5: R2_SS5.1 2481.74,3722.55 2484.67,3719.62 2491.09,3719.62 2565.92,3644.79 2565.92,2646.68 2774.6,2438 v1(3499,2438)
P2_5: R1_SS5.1 U1.23 | length 2401.4
  Top Layer w5: v1(3576,2406) 3624.99,2406 U1.23
  Bottom Layer w5: R1_SS5.1 2135.42,3566 2323,3566 2443,3446 2443,2717.52 2754.52,2406 v1(3576,2406)
P2_6: R1_SS1.1 U1.24 | length 3479
  Top Layer w5: v1(3656,2466) 3657.01,2464.99 3657.01,2408.54 U1.24
  Bottom Layer w5: R1_SS1.1 2068,4612.03 2136,4544.03 2136,4050 2217,3969 2442,3969 2788,3623 2788,2511 2833,2466 v1(3656,2466)
P2_7: R2_SS1.1 U1.25 | length 3569.7
  Top Layer w5: v1(3689,2466) 3689.26,2465.74 3689.26,2407.78 U1.25
  Bottom Layer w5: R2_SS1.1@2033.7,4700.3 R2_SS1.1@2034,4700 ; R2_SS1.1 2033.88,4698.04 2163,4568.91 2163,4065 2229,3999 2454,3999 2829,3624 2829,2542 2880,2491 3664,2491 v1(3689,2466)
P3_0: R1_SS2.1 U1.5 | length 2141.1
  Top Layer w5: U1.5 3815.75,2878.72 3815.75,2940.75 v1(3816,2941)
  Bottom Layer w5: R1_SS2.1 3287,4722 3816,4193 v1(3816,2941)
P3_1: R2_SS2.1 U1.7 | length 2101.2
  Top Layer w5: U1.7 3752.5,2923.5 v1(3769,2940)
  Bottom Layer w5: R2_SS2.1 3257.99,4698.01 3786,4170 3786,2957 v1(3769,2940)
P3_2: R1_SS3.1 U1.8 | length 1837.2
  Top Layer w5: U1.8 3721.5,2878.97 3721.5,3017.5 v1(3926,3222)
  Bottom Layer w5: v1(3926,3222) 4096.03,3392.03 4096.03,4517.97 4077.07,4536.93 4072.93,4536.93 4072.01,4536.01 R1_SS3.1
P3_3: R2_SS3.1 U1.9 | length 1769.2
  Top Layer w5: U1.9 3690.26,2879.22 3690.26,3038.26 v1(3877,3225)
  Bottom Layer w5: v1(3877,3225) 4002,3350 R2_SS3.1
P3_4: R1_SS4.1 U1.10 | length 2681.5
  Top Layer w5: U1.10 3658.02,3052.02 4610,4004 v1(4653,4004)
  Bottom Layer w5: v1(4653,4004) 5218,4004 5223,4009 5224,4009 5283,4068 5283,4475.25 5318.58,4510.83 5318.58,4512.8 5319.03,4513.25 R1_SS4.1
P3_5: R2_SS4.1 U1.11 | length 2683.1
  Top Layer w5: U1.11 3628,2879.95 3628,3065 4596.38,4033.38 v1(4654.27,4033.38)
  Bottom Layer w5: v1(4654.27,4033.38) 4654.65,4033 5217,4033 5261,4077 5261,4499.25 R2_SS4.1
P3_6: R22.1 U1.12 | length 1451.9
  Top Layer w8: U1.12 3595.52,2800.48 3736,2660 3736,2658.69 3740.69,2654 3753,2654 3780,2627 3780,2597 3754,2571 3691,2571 3544,2424 3544,2394 3665,2273 R22.1
PM: LED2.2 LED4.2 R22.2 | length 345.9
  Top Layer w15: LED4.2 3357,1662 3535,1662 LED2.2 3623,1574 R22.2
RST: C1.2 R6.2 SW1.1@2646,3090.8 U1.4 | length 1622.2
  Top Layer w8: SW1.1@2646,3090.8 2646,2985.19 2772.19,2859 R6.2 ; C1.2 2726,2712.91 2780,2766.91 R6.2 ; U1.4 3846.99,2837.99 3823,2814 3620,2814 3551,2883 3155.25,2883 3131.25,2859 R6.2
SCL: R20.1 U1.41 U2.6 | length 1279.1
  Top Layer w5: v1(4339,1954) 4340,1953 4340,1890.87 U2.6
  Top Layer w8: U1.41 4019.97,2705.5 4077.5,2705.5 v1(4078,2705)
  Top Layer w15: U2.6 4341,1786 4437,1690 4492,1690 R20.1
  Bottom Layer w8: v1(4078,2705) 4339,2444 v1(4339,1954)
SDA: R21.1 U1.40 U2.5 | length 1211.2
  Top Layer w8: U1.40 4155.5,2674.5 v1(4156,2674) ; v1(4389,1952) 4390,1951 4390,1890.87 U2.5
  Top Layer w15: U2.5 4391,1808 4411,1788 4491,1788 R21.1
  Bottom Layer w8: v1(4156,2674) 4389,2441 v1(4389,1952)
SP: R24.2 U1.3 | length 1725.4
  Top Layer w5: R24.2 v1(2600,2424) ; v1(3877,2595) 3877.74,2595.74 3877.74,2877.73 U1.3
  Bottom Layer w5: v1(2600,2424) 2693,2424 2737,2380 3662,2380 v1(3877,2595)
Up: C1_BB2.2 R1_BB2.2 SW1_BB2.2 U1.43 | length 1175.2
  Top Layer w5: R1_BB2.2 4806.87,2698.13 SW1_BB2.2 ; C1_BB2.2 C1_BB2.2@4944,2650.39
  Top Layer w8: U1.43 4067.98,2768.98 4120,2821 4684,2821 4795.38,2709.62 4803.25,2709.62 4815,2697.87 SW1_BB2.2 4815,2682.13 4826.75,2670.38 4834.62,2670.38 4855.61,2649.39 C1_BB2.2
VCC: C1.1 C2.2 C3.2 C10.2 C11.2 D2.K LM1.3 LS1.1 Q1_SS1.2 Q1_SS2.2 Q1_SS3.2 Q1_SS4.2 Q1_SS5.2 Q1_SS6.2 Q1_SS7.2 Q2_SS1.2 Q2_SS2.2 Q2_SS3.2 Q2_SS4.2 Q2_SS5.2 Q2_SS6.2 Q2_SS7.2 R1_BB1.1 R1_BB2.1 R1_BB3.1 R1_BB4.1 R1_BB5.1 R19.2 R20.2 R21.2 R30.2 RPB1.1 SW1.2@2646,2815.2 U1.29 U1.38 U2.8 | length 16375.7
  Top Layer w5: R1_BB1.1 R1_BB2.1 v1(4670,2755) ; R1_BB3.1 v1(4942,2755) ; R1_BB4.1 5048.06,2948.19 5071.94,2948.19 R1_BB5.1 v1(5072,2755)
  Top Layer w8: v1(1974,4706) 1975,4705 2885,4705 2890,4700 v1(3087,4700) 3975,4700 v1(4135,4540) ; LS1.1 2278.5,3242.45 2249.47,3271.48 2249.47,3474.98 v1(2369.95,3595.46) 3332.46,3595.46 v1(3377,3640) 4136.11,3640 4139.11,3637 v1(4141,3637) ; C11.2 2625.61,2706.61 C1.1 ; v1(4295,3632) v1@4624.11,3632 ; R20.2 R21.2 5317,1790 5522,1995 RPB1.1 ; v1(4629,3635) 4776,3635 5108,3303 5108,2791 v1(5072,2755)
  Top Layer w15: D2.K 2071,2400.17 2079.25,2391.92 2081.22,2391.92 2376.13,2097 2485,2097 2509,2073 R30.2 2516.81,2020 2600.72,1936.09 2608.49,1936.09 2624.61,1919.97 C10.2 ; LS1.1 2414.08,3055 2646,2823.08 2646,2815.2 2646,2727 C1.1 ; LM1.3 2611,1904.39 C10.2 ; C11.2 2625.61,1919 C10.2 ; C2.2 3838,2282.39 C3.2 ; R19.2 4146,1840 4195.87,1889.87 U2.8 4241,1960 3917.61,2283.39 C3.2 ; v1(4310,2607) 4305.5,2611.5 U1.38 3967.5,2611.5 3815.5,2459.5 U1.29 3815.5,2304.92 3837.03,2283.39 C3.2 ; v1(5072,2755) 5228,2755 5522,2461 RPB1.1
  Bottom Layer w8: Q1_SS1.2 1914.79,4615 Q2_SS1.2 1919.79,4651.79 v1(1974,4706) ; Q1_SS5.2 2366.79,3654 Q2_SS5.2 2369.95,3650.84 v1(2369.95,3595.46) ; Q1_SS2.2 3089.79,4613 Q2_SS2.2 3087,4625.79 v1(3087,4700) ; v1(3377,3640) 3377,3641.89 3374.21,3644.69 Q1_SS6.2 Q2_SS6.2 ; v1(4141,3637) 4288.11,3637 4293.11,3632 v1(4295,3632) 4295,4333.44 4297.53,4335.97 4297.53,4372.03 4295,4374.56 4295,4380 v1(4135,4540) 4135,4612.79 Q1_SS3.2 4335.79,4613 Q2_SS3.2 ; v1(4629,3635) 4629,3636.89 4623,3642.89 Q1_SS7.2 Q2_SS7.2 ; Q1_SS4.2 5628.79,4610 Q2_SS4.2
  Bottom Layer w15: v1(4310,2607) 4458,2755 v1(4670,2755) v1(4942,2755) v1(5072,2755)
pads on no net: GIÂY.2 GIỜ.2 LM1.0 NGÀY.2 NĂM.2 PHÚT.2 RPB1.9 THÁNG.2 THỨ.2 U1.6 U1.13 U1.26 U1.27 U1.28 U1.30 U1.39
copper on no net: | length 1.4
  Top Layer w5: 3784,2878.47 3785,2879.47
  other v3: 5023.31,1667.94 5338.28,1667.94

## Polygon pours and split planes (outlines as drawn)
GND on Top Layer "GND_L01_P000" (solid, pour order 0): 1442,4962 1439,4959 1439,1328 5888,1328 5894,1334 5888,1340 5888,4962

## Keep-outs
Keep-Out Layer:
  lines w10: 1040,1303 1040,4972 1042,4974 6074,4974 6080,4980 6080,1304 1041,1304 1040,1303 ; 1427,1326 5820,1326 5901,1326 5903,1328 5903,4967 5900,4970 1432,4970 1432,4956 1432,1331 1427,1326

## Text inside footprints (layer, text, board x,y; h text height)
LS1: Top Overlay "+" at 2250.5,2999.5 h60 r270